# EAGLE board rpi-management (EAGLE 7.2.0)
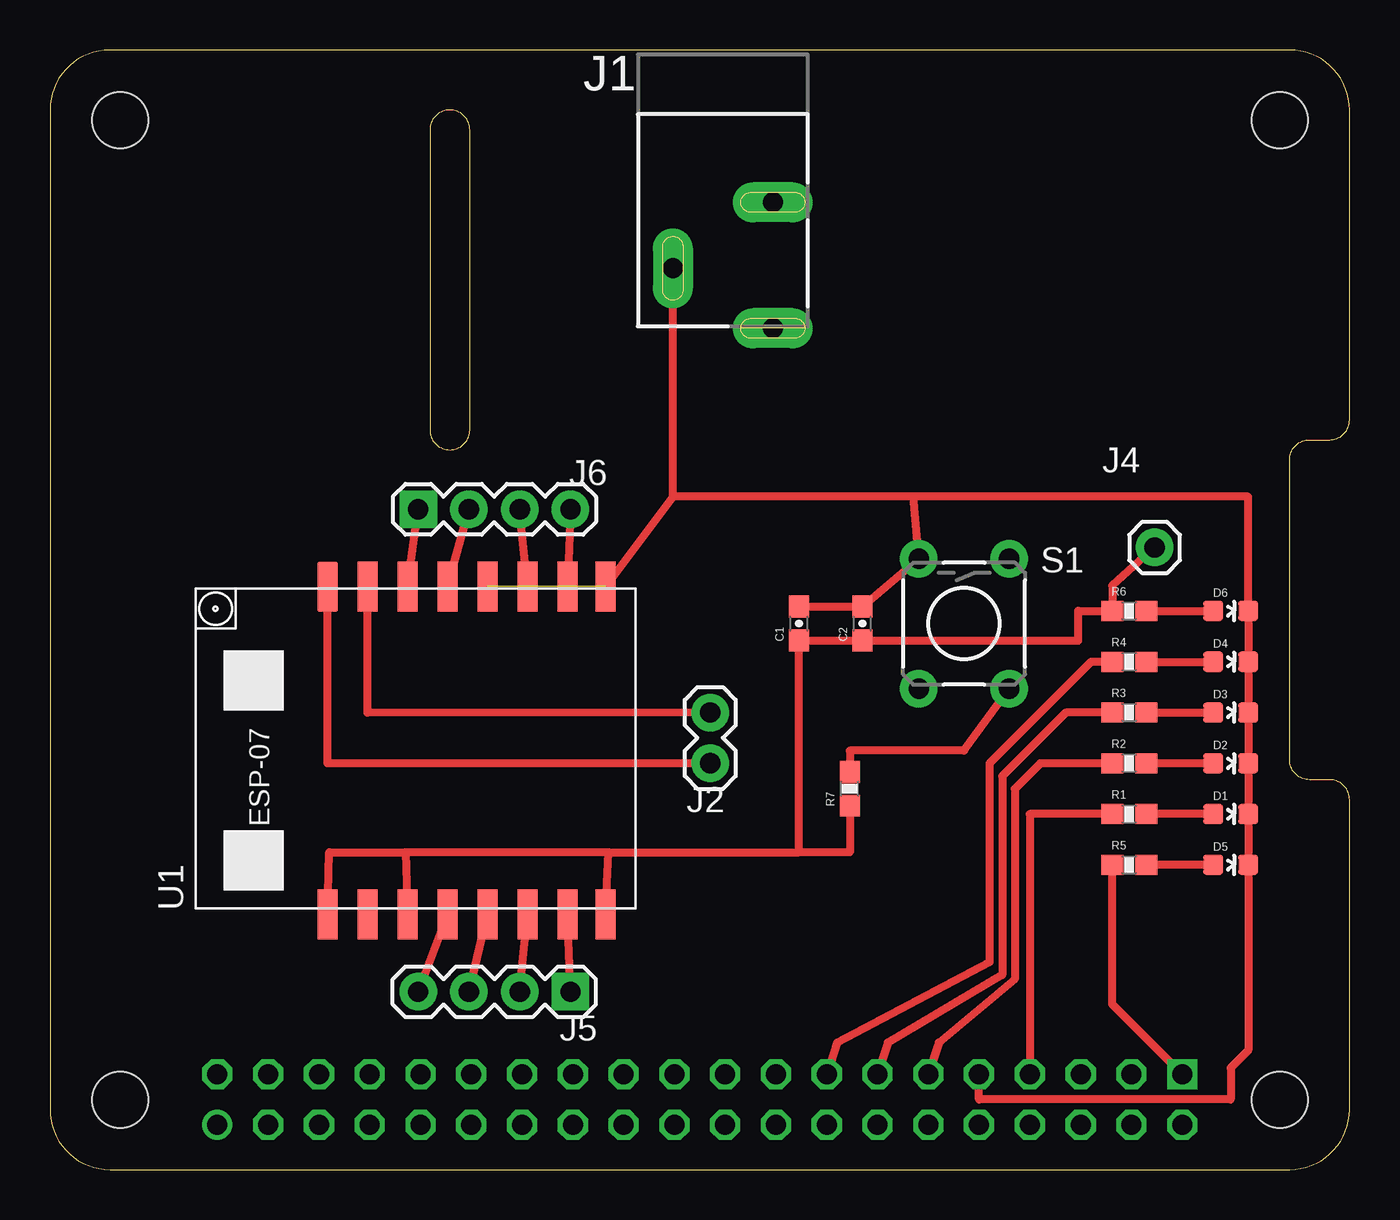
[diagram p0: board, top side]
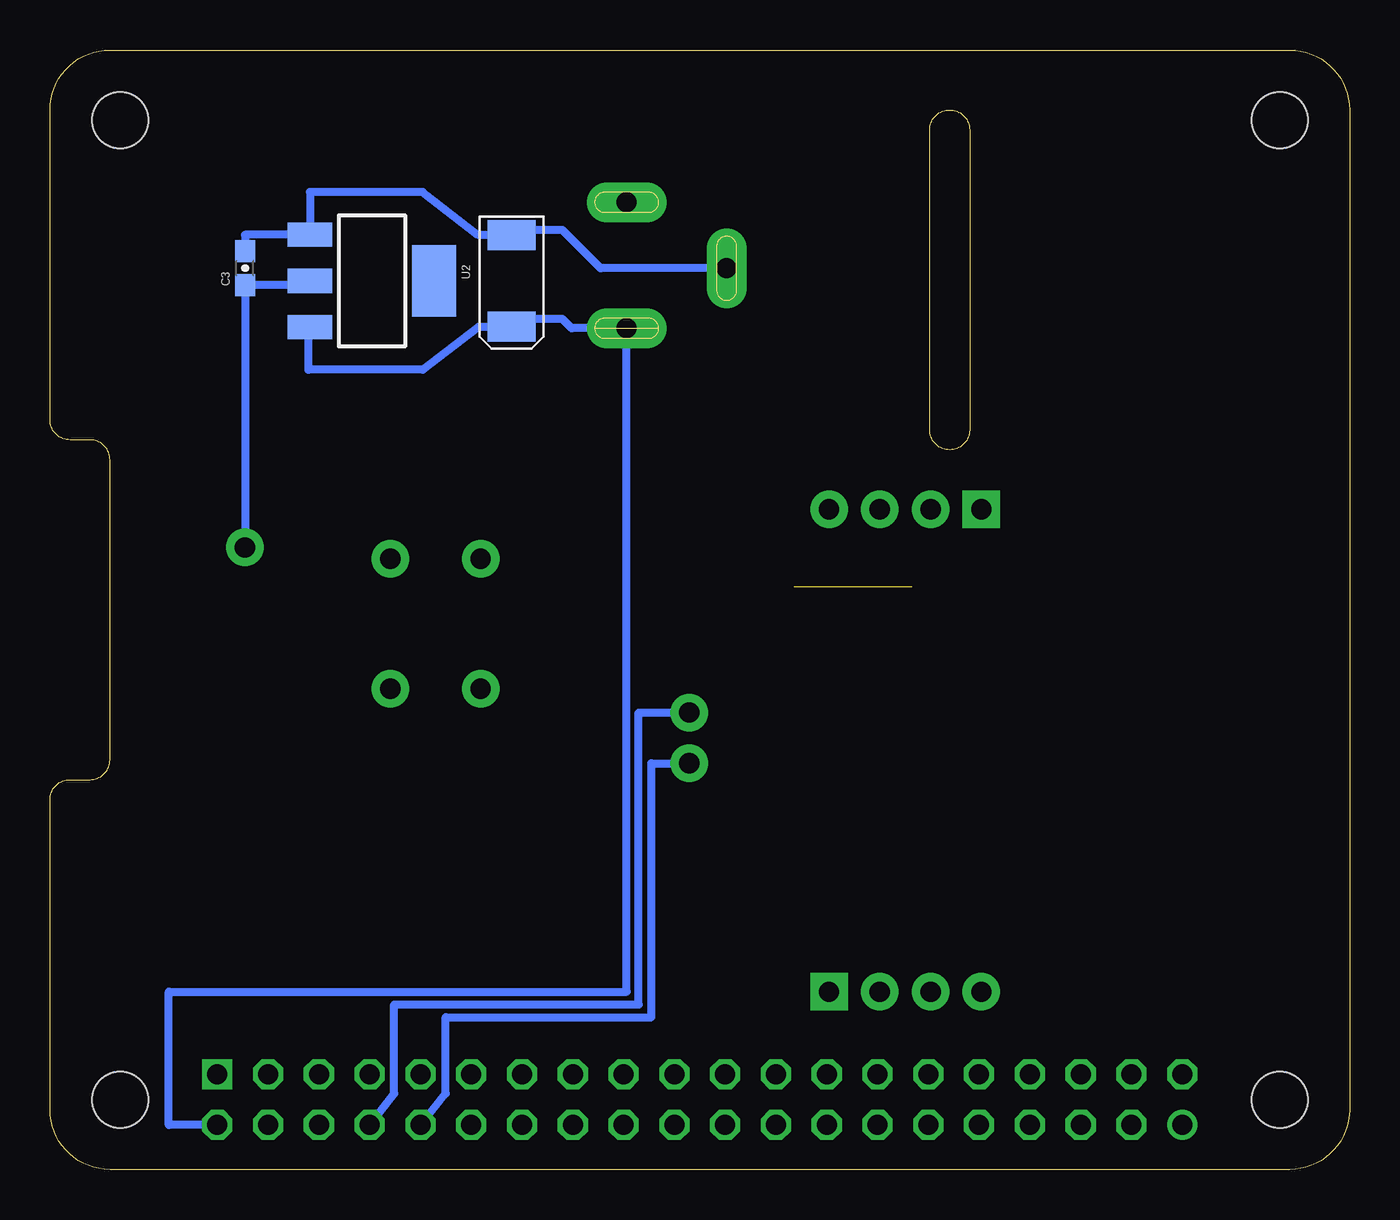
[diagram p1: board, bottom side, seen from below]

Size 65 x 56 mm. Coordinates in mm from the lower left corner, seen from the top.
Copper layers (1*16): Top 0.035mm / dielectric 1.5mm / Bottom 0.035mm
Design rules "default *": minimum track width 6mil, minimum drill 0.3mm, track to track 6mil, track to pad 6mil, pad to pad 6mil, via to via 6mil, smd to smd 6mil, copper to edge 20mil, drill to drill 8mil, minimum pad ring 10mil, minimum via ring 8mil, stop-mask expansion 0.3mm, vias tented up to drill 0.5mm, thermal gap 10mil

## Footprints (pad centres in the part's own frame; a part is rotated, then mirrored left to right if it is on the bottom)
0603-CAP = smd 1.1 x 1: 1 -0.85,0; 2 0.85,0
EIA6032 = smd 1.5 x 2.4: P$1 -2.3,0; P$2 2.3,0
LED-0603 = smd 1 x 1: A 0,-0.877; C 0,0.877
POWER_JACK_SLOT = drill 1 pad 2 long: GND@1 2.58,7.5; GND@2 7.58,10.8; PWR 2.58,13.8
1X02 = drill 1.016 pad 1.88: 1 0,0; 2 2.54,0
1X01 = drill 1.016 pad 1.88: 1 0,0
1X04 = drill 1.016 pad 1.88 square: 1 0,0 | drill 1.016 pad 1.88: 2 2.54,0; 3 5.08,0; 4 7.62,0
0603-RES = smd 1.1 x 1: 1 -0.85,0; 2 0.85,0
RPI-B+HAT_CUTOUT = drill 1 square: 1 56.63,4.77 | drill 1 octagon: 2 56.63,2.23; 3 54.09,4.77; 4 54.09,2.23; 5 51.55,4.77; 6 51.55,2.23; 7 49.01,4.77; 8 49.01,2.23; 9 46.47,4.77; 10 46.47,2.23; 11 43.93,4.77; 12 43.93,2.23; 13 41.39,4.77; 14 41.39,2.23; 15 38.85,4.77; 16 38.85,2.23; 17 36.31,4.77; 18 36.31,2.23; 19 33.77,4.77; 20 33.77,2.23; 21 31.23,4.77; 22 31.23,2.23; 23 28.69,4.77; 24 28.69,2.23; 25 26.15,4.77; 26 26.15,2.23; 27 23.61,4.77; 28 23.61,2.23; 29 21.07,4.77; 30 21.07,2.23; 31 18.53,4.77; 32 18.53,2.23; 33 15.99,4.77; 34 15.99,2.23; 35 13.45,4.77; 36 13.45,2.23; 37 10.91,4.77; 38 10.91,2.23; 39 8.37,4.77 | drill 1: 40 8.37,2.23 | hole 2.8: 3.5,3.5; 3.5,52.5; 61.5,52.5; 61.5,3.5
TACTILE-PTH = drill 1.016 pad 1.88: 1 -3.251,2.261; 2 3.251,2.261; 3 -3.251,-2.261; 4 3.251,-2.261
ESP07-16PIN = smd 2.5 x 1: ADC -8.2,3.8; CH_PD -8.2,1.8; GND 8.2,-8.105; GPIO0 8.2,-2.2; GPIO2 8.2,-4.2; GPIO4 8.2,1.8; GPIO5 8.2,-0.2; GPIO12 -8.2,-4.2; GPIO13 -8.2,-6.2; GPIO14 -8.2,-2.2; GPIO15 8.2,-6.2; GPIO16 -8.2,-0.2; REST -8.2,5.8; RX 8.2,3.8; TX 8.2,5.8; VCC -8.2,-8.105
SOT223 = smd 1.219 x 2.235: 1 -2.311,-3.099; 2 0,-3.099; 3 2.311,-3.099 | smd 3.6 x 2.2: 4 0,3.099

## Placement (x,y rotation side)
C1  100uF  [0603-CAP]  37.47,27.3 90 top
C2  1uF  [0603-CAP]  40.64,27.3 90 top
C3  100uF  [0603-CAP]  55.24,45.09 90 bottom
C4  10uF  [EIA6032]  41.91,44.45 90 bottom
D1  Agent_On  [LED-0603]  59.05,17.78 270 top
D2  Led1  [LED-0603]  59.05,20.32 270 top
D3  Led2  [LED-0603]  59.05,22.86 270 top
D4  Led3  [LED-0603]  59.05,25.4 270 top
D5  PowerOn  [LED-0603]  59.05,15.24 270 top
D6  ESP8266_ON  [LED-0603]  59.05,27.94 270 top
J1  5v Regulated!  [POWER_JACK_SLOT]  38.73,55.88 180 top
J2  TxRx  [1X02]  33.02,20.32 90 top
J4  3v3 TP  [1X01]  55.24,31.11 0 top
J5  GPIO1  [1X04]  26.04,8.89 180 top
J6  GPIO2  [1X04]  18.41,33.02 0 top
R1  330R  [0603-RES]  53.98,17.78 0 top
R2  330R  [0603-RES]  53.98,20.32 0 top
R3  330R  [0603-RES]  53.98,22.86 0 top
R4  330R  [0603-RES]  53.98,25.4 0 top
R5  330R  [0603-RES]  53.98,15.24 0 top
R6  330R  [0603-RES]  53.98,27.94 0 top
R7  1k  [0603-RES]  40.01,19.05 90 top
RPI  RPI_B+-HATCUT  [RPI-B+HAT_CUTOUT]  0,0 0 top
S1  Program  [TACTILE-PTH]  45.72,27.3 270 top
U1  ESP07-16PIN  [ESP07-16PIN]  19.68,20.95 90 top
U2  AMC1117-3.3  [SOT223]  48.9,44.45 270 bottom

## Library data of the parts
C1-C3 = SparkFun-Capacitors
C4 R1-R7 = SparkFun-Passives
D1-D6 = SparkFun-LED
J1 = SparkFun-Connectors; PROD_ID: PRT-00119
J2 J4 = SparkFun-Connectors
J5 J6 = SparkFun-Connectors; PROD_ID: CONN-09696
RPI = we-board
S1 = SparkFun-Retired
U1 = esp8266modules; DIMENSIONS: 22.0 x 16.0 mm; PINS: 16; PITCH: 0.078" / 2 mm
U2 = SparkFun-PowerIC; PROD_ID: VREG-08170

## Nets
+5V: C4.P$1 J1.PWR RPI.2 U2.3
GND: C1.2 C2.2 C3.2 C4.P$2 D1.C D2.C D3.C D4.C D5.C D6.C J1.GND@2 RPI.9 S1.3 U1.GND U1.GPIO0 U2.1
N$1: D1.A R1.2
N$2: D2.A R2.2
N$3: D3.A R3.2
N$4: D4.A R4.2
N$5: D5.A R5.2
N$6: R1.1 RPI.7
N$7: R2.1 RPI.11
N$8: R3.1 RPI.13
N$9: R4.1 RPI.15
N$10: R5.1 RPI.1
N$11: J2.1 RPI.10 U1.TX
N$12: J2.2 RPI.8 U1.RX
N$13: R7.2 S1.2
N$14: J5.4 U1.GPIO16
N$15: D6.A R6.2
N$16: C1.1 C2.1 C3.1 J4.1 R6.1 R7.1 U1.CH_PD U1.REST U1.VCC U2.2
N$19: J5.3 U1.GPIO14
N$20: J5.2 U1.GPIO12
N$21: J5.1 U1.GPIO13
N$22: J6.1 U1.GPIO4
N$25: J6.3 U1.GPIO2
N$26: J6.4 U1.GPIO15
N$27: J6.2 U1.GPIO5

## Tracks (layer width: path | path; a pad name or v marks a point on that pad's centre or on a via)
+5V
  Bottom 0.406: RPI.2 59.05,2.23 59.05,8.89 36.16,8.89 J1.PWR 38.91,42.08 39.37,42.55 41.67,42.55 C4.P$1 43.58,42.15 46.35,40.01 52.07,40.01 52.07,42.06 U2.3
GND  (1 unrouted)
  Top 0.406: 43.18,33.66 S1.3 C2.2 C1.2 | 43.18,33.66 31.16,33.66 | 31.16,33.66 J1.GND@2 | 43.18,33.66 59.93,33.66 D6.C D4.C D3.C D2.C D1.C D5.C 59.93,5.96 59.05,5.08 59.05,3.5 46.47,3.5 RPI.9 | U1.GND 31.16,33.66
  Bottom 0.406: J1.GND@2 37.46,45.08 39.37,46.99 41.52,46.99 C4.P$2 43.58,46.75 46.35,48.9 51.99,48.9 U2.1 55.24,46.76 C3.2
N$1
  Top 0.406: D1.A R1.2
N$2
  Top 0.406: D2.A R2.2
N$3
  Top 0.406: R3.2 D3.A
N$4
  Top 0.406: R4.2 D4.A
N$5
  Top 0.406: D5.A R5.2
N$6
  Top 0.406: R1.1 49.01,17.78 RPI.7
N$7
  Top 0.406: R2.1 49.53,20.32 48.26,19.05 48.26,9.53 44.45,6.35 RPI.11
N$8
  Top 0.406: R3.1 50.8,22.86 47.62,19.68 47.62,9.73 41.91,6.35 RPI.13
N$9
  Top 0.406: R4.1 52.07,25.4 46.99,20.32 46.99,10.37 39.37,6.35 RPI.15
N$10
  Top 0.406: RPI.1 53.12,8.28 R5.1
N$11
  Top 0.406: J2.1 13.88,20.32 U1.TX
  Bottom 0.406: RPI.10 45.21,3.81 45.21,7.62 34.92,7.62 34.92,20.32 J2.1
N$12
  Top 0.406: J2.2 15.88,22.85 U1.RX
  Bottom 0.406: RPI.8 47.78,3.81 47.78,8.26 35.56,8.26 35.56,22.86 J2.2
N$13
  Top 0.406: S1.2 45.72,20.95 40.01,20.95 R7.2
N$14
  Top 0.406: J5.4 U1.GPIO16
N$15
  Top 0.406: R6.2 D6.A
N$16
  Top 0.406: J4.1 53.12,29.21 R6.1 51.44,27.94 51.44,26.45 C2.1 C1.1 37.47,15.88 | U1.VCC 27.94,15.88 | 27.94,15.88 17.78,15.88 | 17.78,15.88 U1.CH_PD | U1.REST 13.97,15.88 17.78,15.88 | 27.94,15.88 37.47,15.88 | R7.1 40.01,15.88 37.47,15.88
  Bottom 0.406: U2.2 51.99,44.23 C3.1 J4.1
N$19
  Top 0.406: J5.3 U1.GPIO14
N$20
  Top 0.406: J5.2 U1.GPIO12
N$21
  Top 0.406: J5.1 U1.GPIO13
N$22
  Top 0.406: U1.GPIO4 J6.1
N$25
  Top 0.406: U1.GPIO2 J6.3
N$26
  Top 0.406: J6.4 U1.GPIO15
N$27
  Top 0.406: U1.GPIO5 J6.2